# Altium PCB CustomESP32.PcbDoc
Units mil, origin at the board's own origin, x right, y up, seen from the top; angles counter-clockwise.
Board outline 2500 x 800 mil, 6 copper layers (L1 (Signal/Power), L2 (GND), L3 (Signal), L4 (Signal), L5 (GND), L6 (Signal/Power)), stack 55.468 mil thick; 49 components, 49 nets, 216 pads, 87 vias.
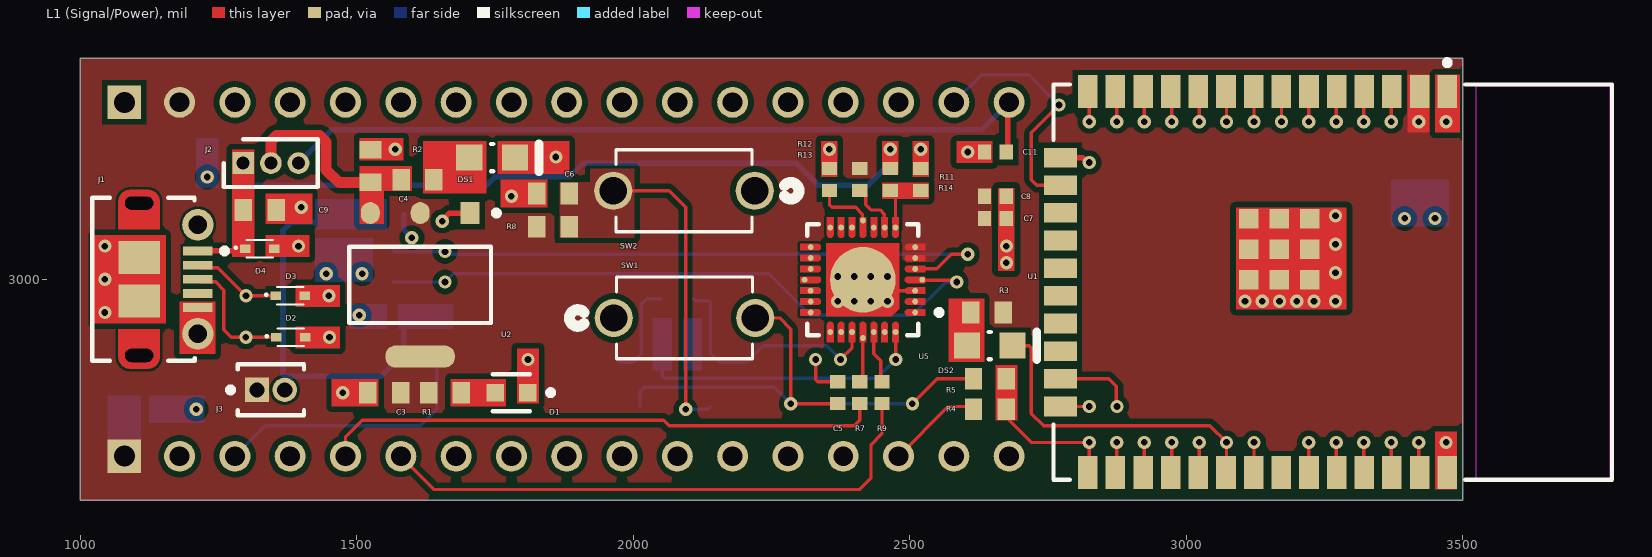
[diagram p0: L1 (Signal/Power) view]
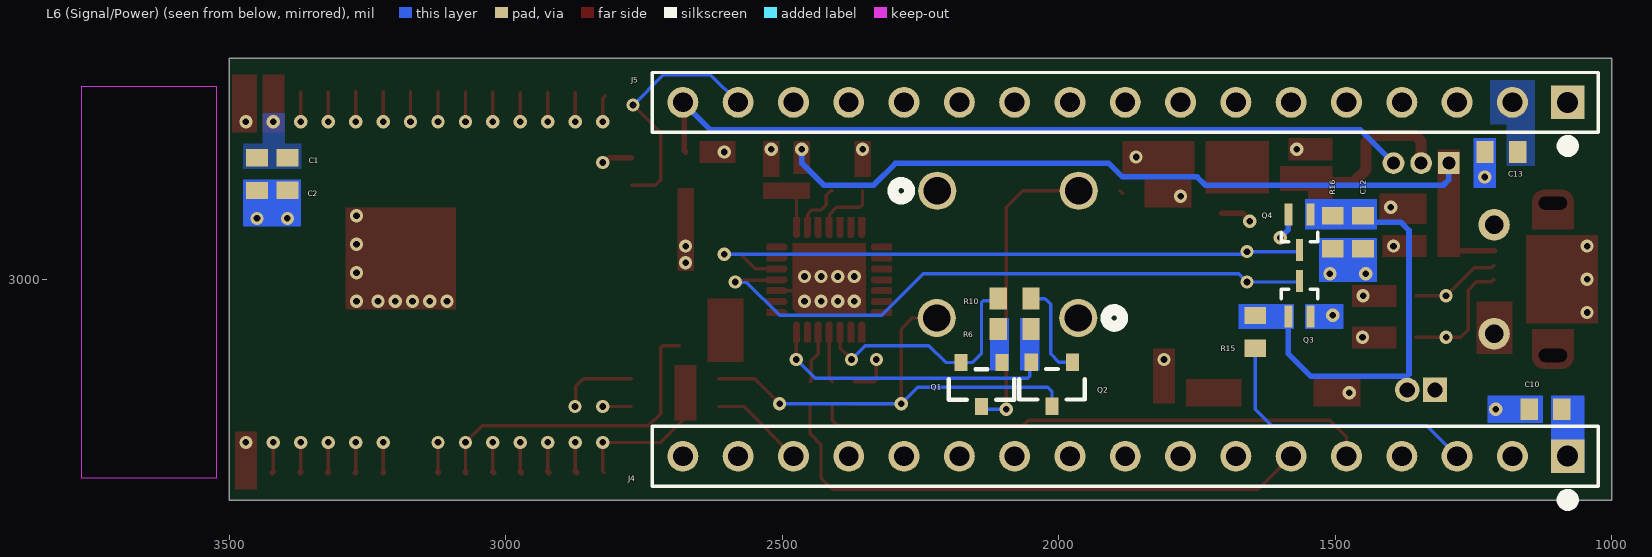
[diagram p1: L6 (Signal/Power) view, seen from below]
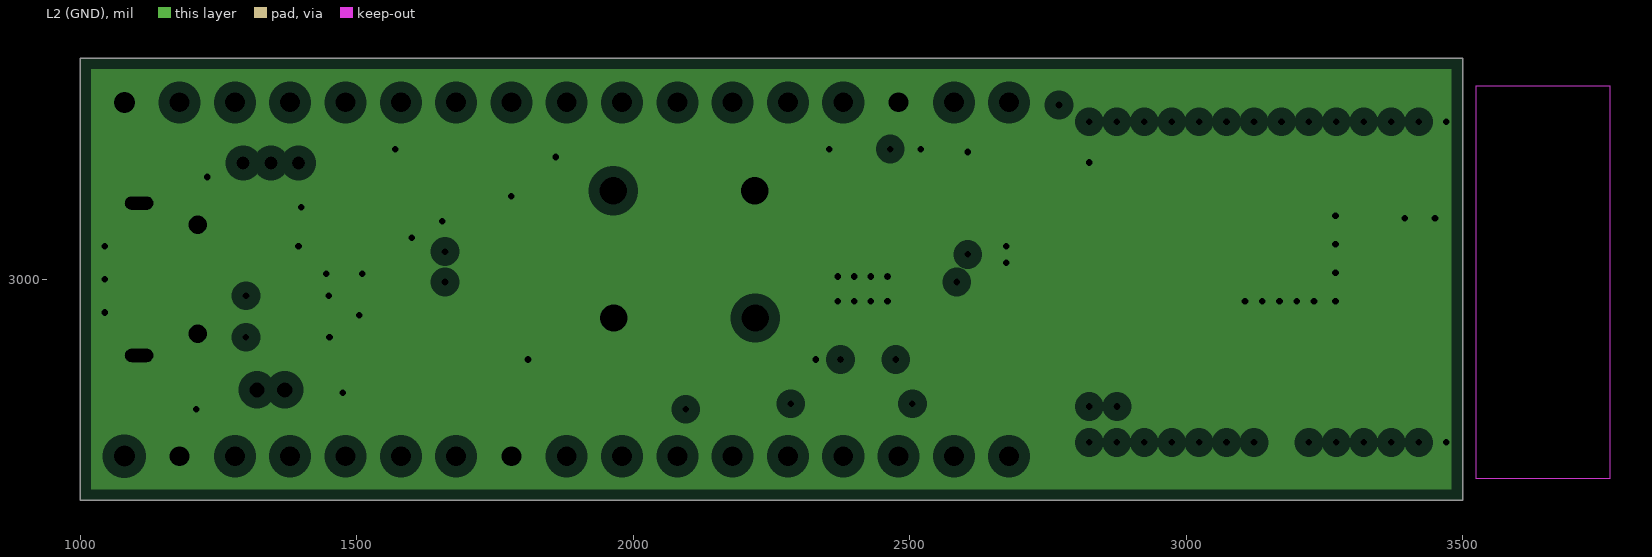
[diagram p2: L2 (GND), clearances drawn from the general rule]
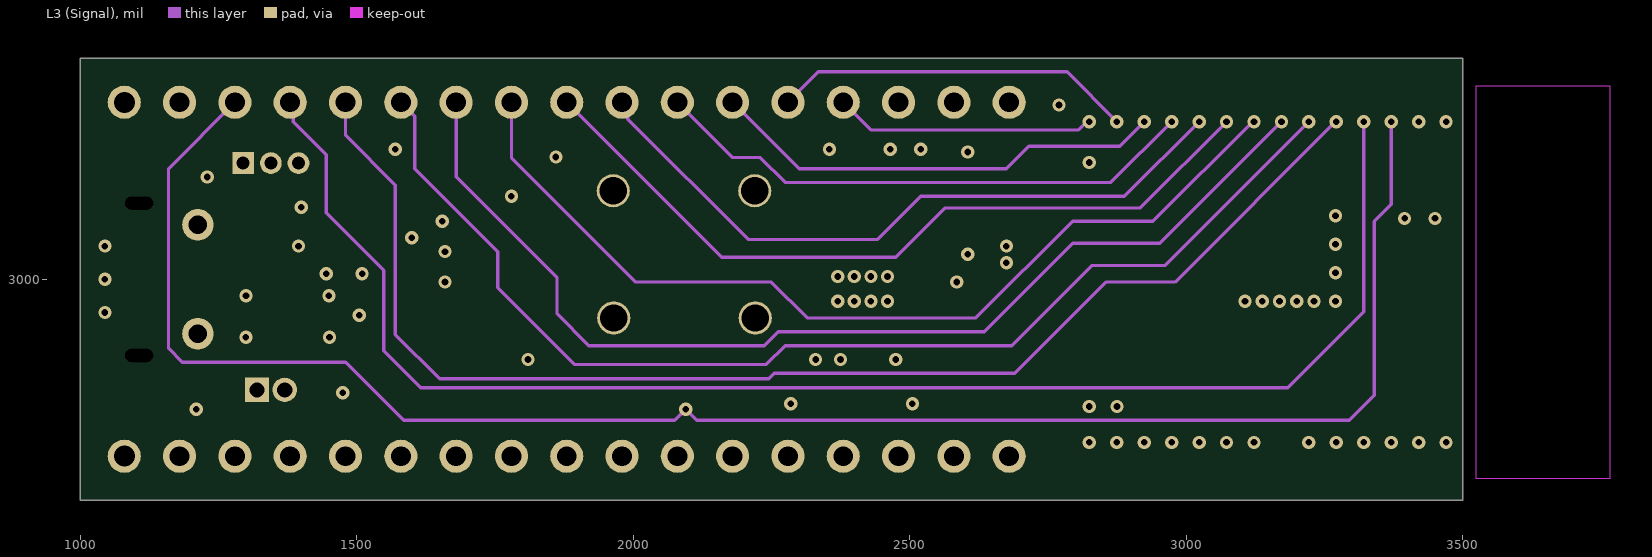
[diagram p3: L3 (Signal)]
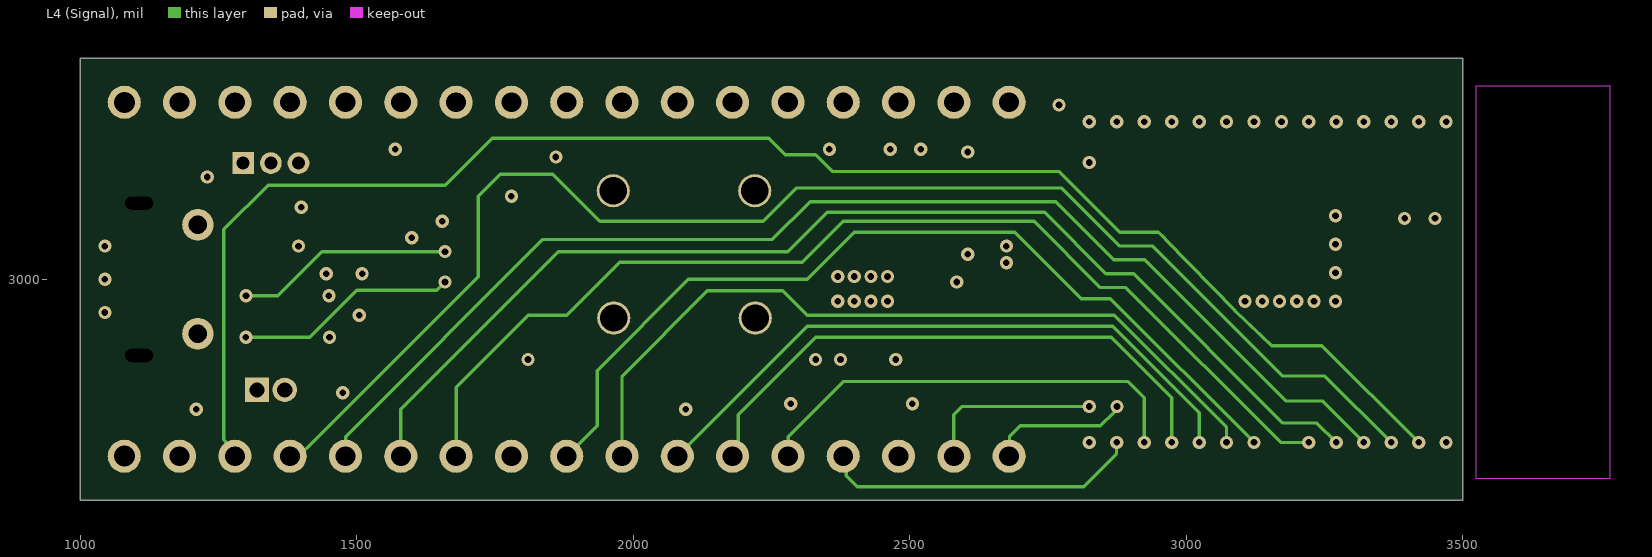
[diagram p4: L4 (Signal)]
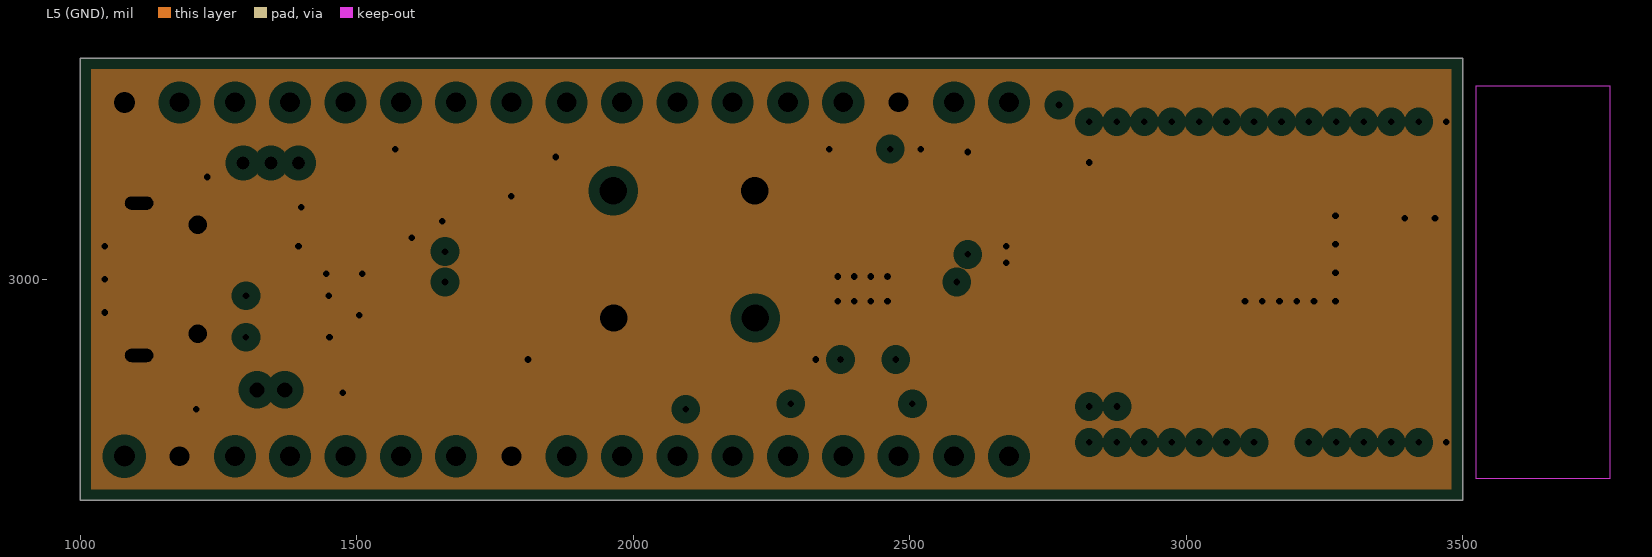
[diagram p5: L5 (GND), clearances drawn from the general rule]
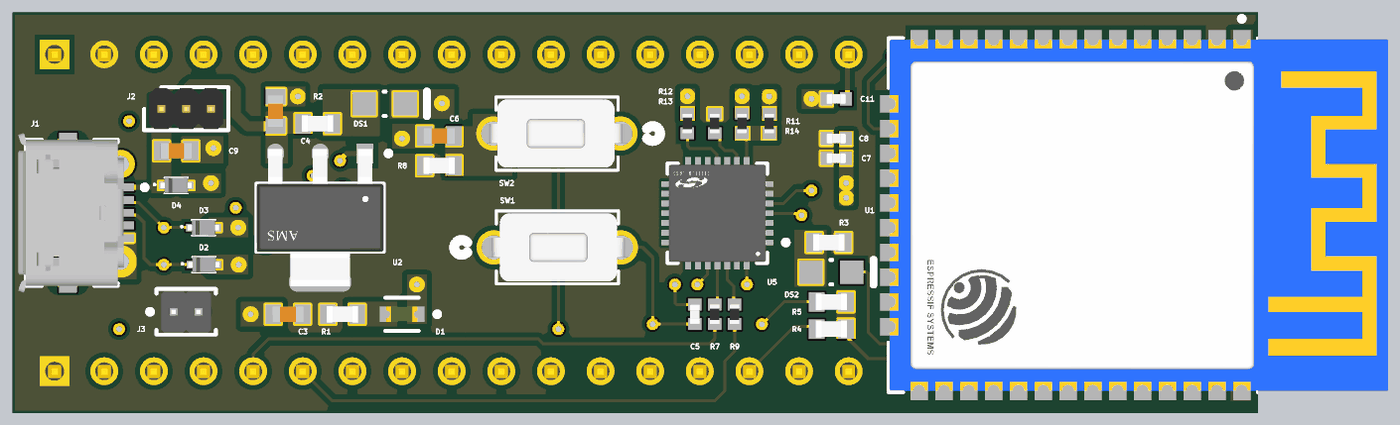
[diagram p6: 3D render of the assembled board from above, using the file's embedded part models]
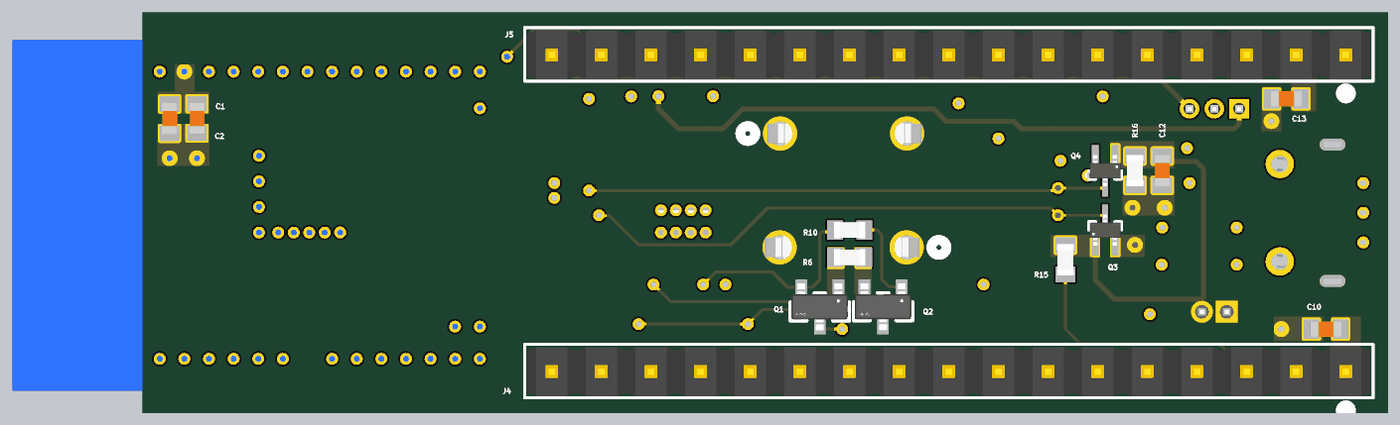
[diagram p7: 3D render of the assembled board from below, using the file's embedded part models]

## Layer stack, top to bottom
Top Solder: solder mask 1, SM-001, Dk 4
L1 (Signal/Power): signal copper 1.378
Dielectric 1: prepreg 2.8, PP-006, Dk 4.1
L2 (GND): plane copper 1.378, net GND
Dielectric 3: core 18, Core-035, Dk 4.7
L3 (Signal): signal copper 1.378
Dielectric 4: prepreg 2.8, PP-006, Dk 4.1
Dielectric 5: prepreg 2.8, PP-006, Dk 4.1
L4 (Signal): signal copper 1.378
Dielectric 6: core 18, Core-035, Dk 4.7
L5 (GND): plane copper 1.378, net GND
Dielectric 8: prepreg 2.8, PP-006, Dk 4.1
L6 (Signal/Power): signal copper 1.378
Bottom Solder: solder mask 1, SM-001, Dk 4

## Board outline
1000,2600 1000,3400 3500,3400 3500,2600

## Design rules (kind name [scope] priority, off if disabled: settings)
Clearance Clearance_J3 [HasFootprint('FP-GRPB021VWVN-RC-MFG')] p1: gap=5 ignorepadtopadclearanceinfootprint=FALSE
Clearance Clearance_J1 [HasFootprint('USB-MICRO-B_V')] p2: gap=5 ignorepadtopadclearanceinfootprint=FALSE
Clearance Clearance_U5 [HasFootprint('FP-CP2102N-A02-GQFN28-MFG')] p3: gap=5 ignorepadtopadclearanceinfootprint=FALSE
Clearance [All] p4: gap=10 ignorepadtopadclearanceinfootprint=FALSE except(0: Arc-Hole Track-Hole SMDPad-Hole THPad-Hole Via-Hole Fill-Hole Poly-Hole Region-Hole Text-Hole)
MinimumSolderMaskSliver MinimumSolderMaskSliver_1 [HasFootprint('USB-MICRO-B_V')] p1: minsoldermaskwidth=0
MinimumSolderMaskSliver [All] p2: minsoldermaskwidth=2
PlaneClearance [All] p1: clearance=20
PlaneConnect [All] p1: planeconnectstyle=Direct reliefexpansion=20 reliefentries=4 reliefconductorwidth=10 reliefairgap=10
PolygonConnect [All] p1: connectstyle=Direct reliefconductorwidth=10 reliefentries=4 polygonreliefangle="90 Angle" airgapwidth=10
RoutingVias [All] p1: holewidth=15 width=30 viastyle="Through Hole" minholewidth=15 minwidth=30 maxholewidth=28 maxwidth=50
SilkToSilkClearance [All] p1: silktosilkclearance=5
SilkToSolderMaskClearance [IsPad] p1: minsilkscreentomaskgap=3 clearancetoexposedcopper=TRUE
SolderMaskExpansion [All] p1: expansion=4 istentingtop=FALSE
Width [All] p1: maxlimit=20 minlimit=6 preferedwidth=10 midlayer1_maxwidth=10 midlayer2_maxwidth=10 minimp=50.000000 maximp=50.000000 favimp=50.000000
25 further rules are at their usual default settings.

## Components (designator, comment, footprint, x,y, rotation, side; value= is the part's Value field where it differs from the comment)
C1 "22uF/10V(20%)" CAP_0603 3395,3190.47 r90 bottom
C2 "0.1uF/50V(10%)" CAP_0603 3450,3190 r90 bottom
C3 "10uF/10V(20%)" CAP_0603 1550,2795 r0 top
C4 "10uF/10V(20%)" CAP_0603 1525,3205 r270 top
C5 "0.1uF/50V(10%)" CAP_0402 2370,2795 r270 top
C6 "0.1uF/50V(10%)" CAP_0603 1855,3155 r0 top
C7 "4.7uF/6.3V(10%)" CAP_0402 2655,3110 r180 top
C8 "0.1uF/50V(10%)" CAP_0402 2655,3150 r180 top
C9 "0.1uF/50V(10%)" CAP_0603 1325,3125 r180 top
C10 "0.1uF/50V(10%)" CAP_0603 1120,2765 r180 bottom
C11 "0.1uF/50V(10%)" CAP_0402 2655,3230 r0 top
C12 "0.1uF/50V(10%)" CAP_0603 1450,3085 r90 bottom
C13 "0.1uF/50V(10%)" CAP_0603 1200,3230 r180 bottom
D1 "LTST-C190GKT" FP-LTST-C190GKT-MFG 1780,2795 r180 top
D2 "LESD5D5.0CT1G" LESD5D50CT1G 1380.98,2895 r0 top
D3 "LESD5D5.0CT1G" LESD5D50CT1G 1380,2970 r0 top
D4 "LESD5D5.0CT1G" LESD5D50CT1G 1325,3055 r0 top
DS1 "LTST-C170KRKT" LTST-C170KRKT_V 1745,3220 r0 top
DS2 "LTST-C170KRKT" LTST-C170KRKT_V 2645,2880 r0 top
J1 "105017-0001" USB-MICRO-B_V 1160,3000 r270 top
J2 "M50-3530342" M50-3530342 1295,3210 r0 top
J3 "GRPB021VWVN-RC" FP-GRPB021VWVN-RC-MFG 1345,2800 r0 top
J4 "22284170" 22284170 1080,2680 r180 bottom
J5 "22284170" 22284170 1080,3320 r180 bottom
Q1 "SS8050-G" FP-SS8050-G-MFG 2140,2809.76 r270 bottom
Q2 "SS8050-G" FP-SS8050-G-MFG 2012.6,2810.24 r270 bottom
Q3 "2N7002T-7-F" 2N7002T-7-F 1565,2965 r90 bottom
Q4 "2N7002T-7-F" 2N7002T-7-F 1565,3085 r270 bottom
R1 "R0603" RES_0603 1660,2795 r180 top
R2 "R0603" RES_0603 1610,3180 r180 top
R3 "R0603" RES_0603 2640,2940 r0 top
R4 "R0603" RES_0603 2645,2765 r0 top
R5 "R0603" RES_0603 2645,2820 r0 top
R6 "10K(5%)" RES_0603 2080,2910 r0 bottom
R7 "0R(5%)" RES_0402 2410,2795 r90 top
R8 "10K(5%)" RES_0603 1855,3095 r0 top
R9 "0R(5%)" RES_0402 2450,2795 r90 top
R10 "10K(5%)" RES_0603 2080,2965 r180 bottom
R11 "22.1K(5%)" RES_0402 2465,3180.31 r90 top
R12 "10K(5%)(NC)" RES_0402 2355,3180.31 r90 top
R13 "1K(5%)" RES_0402 2410,3180.31 r270 top
R14 "47.5K(5%)" RES_0402 2520,3180.31 r270 top
R15 "1K(5%)" RES_0603 1645,2905 r270 bottom
R16 "10K(5%)(NC)" RES_0603 1505,3085 r90 bottom
SW1 "TL1107AF260WQ" TL1107AF260WQ 1965,2930 r0 top
SW2 "TL1107AF260WQ" TL1107AF260WQ 2220,3160 r180 top
U1 "ESP32-WROOM-32E (16MB)" FP-ESP32-WROOM-32E_16MB-MFG 3265,2995 r270 top
U2 "AMS1117-3.3" FP-AMS1117-IPC_C 1615,2990 r270 top
U5 "CP2102N-A02-GQFN28" FP-CP2102N-A02-GQFN28-MFG 2415.51,2999.06 r180 top

## Footprints (in the part's own frame and the unit in brackets; to place one, negate y for a bottom-side part, rotate by r counter-clockwise, add the part's x,y. Pads: shape width x height; smd on the part's side, far side on the other; paste and mask are expansions set on the pad)
2N7002T-7-F [mil]
  rect 40x14 smd: 1(-32,20) 2(-32,-20)
  rect 40x12 smd: 3(32,0)
  silkscreen extent 0,-33 17,33, body extent -31,-31 31,31, height 31
22284170 [mil]
  rect 60x60 / inner round 60 / far side rect 60x60 hole 38 paste-30 mask+0: 1(0,0)
  round 56 / inner round 60 / far side round 56 hole 36 paste-28 mask+0: 2(-100,0) 3(-200,0) 4(-300,0) 5(-400,0) 6(-500,0) 7(-600,0) 8(-700,0) 9(-800,0) 10(-900,0) 11(-1000,0) 12(-1100,0) 13(-1200,0) 14(-1300,0) 15(-1400,0) 16(-1500,0) 17(-1600,0)
  silkscreen extent -1655,-89 55,54, body extent -1650,-50 50,48, height 450
CAP_0402 [mm]
  rect 0.6x0.7 smd: 1(-0.5,0) 2(0.5,0)
  body extent -0.5,-0.26 0.5,0.26, height 0.37
CAP_0603 [mm]
  rect 0.8x1 smd: 1(-0.75,0) 2(0.75,0)
  body extent -0.8,-0.4 0.8,0.4, height 0.51
FP-AMS1117-IPC_C [mm]
  rect 1.004x0.872 smd paste+0 mask+0: 1(-3.295,2.29)
  rrect100% 1.004x0.872 smd paste+0 mask+0: 2(-3.295,0) 3(-3.295,-2.29)
  rrect87% 1.004x3.182 smd paste+0 mask+0: 4(3.295,0)
  silkscreen extent -3.42,-3.25 1.75,3.63, body extent -3.9,-3.35 3.9,3.35, height 0.25
FP-CP2102N-A02-GQFN28-MFG [mm]
  round 0.27 smd paste+0 mask+0: 1(-2.4,1.5) 2(-2.4,1) 3(-2.4,0.5) 4(-2.725,0) 5(-2.4,-0.5) 6(-2.4,-1) 7(-2.4,-1.5) 8(-1.5,-2.4) 9(-1,-2.4) 10(-0.5,-2.4) 11(0,-2.725) 12(0.5,-2.4) 13(1,-2.4) 14(1.5,-2.4) 15(2.4,-1.5) 16(2.4,-1) 17(2.4,-0.5) 18(2.675,0) 19(2.4,0.5) 20(2.4,1) 21(2.4,1.5) 22(1.5,2.4) 23(1,2.4) 24(0.5,2.4) 25(0,2.675) 26(-0.5,2.4) 27(-1,2.4) 28(-1.5,2.4)
  round 3.015 smd paste-1000 mask+0: 29(0,0)
  L1 (Signal/Power) region: -1.35,2.875 -1.35,2.075 -1.361,2.018 -1.394,1.969 -1.443,1.936 -1.5,1.925 -1.5,1.925 -1.557,1.936 -1.606,1.969 -1.639,2.018 -1.65,2.075 -1.65,2.075 -1.65,2.875
  L1 (Signal/Power) region: -0.85,2.875 -0.85,2.075 -0.861,2.018 -0.894,1.969 -0.943,1.936 -1,1.925 -1,1.925 -1.057,1.936 -1.106,1.969 -1.139,2.018 -1.15,2.075 -1.15,2.075 -1.15,2.875
  L1 (Signal/Power) region: -0.35,2.875 -0.35,2.075 -0.361,2.018 -0.394,1.969 -0.443,1.936 -0.5,1.925 -0.5,1.925 -0.557,1.936 -0.606,1.969 -0.639,2.018 -0.65,2.075 -0.65,2.075 -0.65,2.875
  L1 (Signal/Power) region: 0.15,2.875 0.15,2.075 0.139,2.018 0.106,1.969 0.057,1.936 0,1.925 0,1.925 -0.057,1.936 -0.106,1.969 -0.139,2.018 -0.15,2.075 -0.15,2.075 -0.15,2.875
  L1 (Signal/Power) region: 0.65,2.875 0.65,2.075 0.639,2.018 0.606,1.969 0.557,1.936 0.5,1.925 0.5,1.925 0.443,1.936 0.394,1.969 0.361,2.018 0.35,2.075 0.35,2.075 0.35,2.875
  L1 (Signal/Power) region: 1.15,2.875 1.15,2.075 1.139,2.018 1.106,1.969 1.057,1.936 1,1.925 1,1.925 0.943,1.936 0.894,1.969 0.861,2.018 0.85,2.075 0.85,2.075 0.85,2.875
  L1 (Signal/Power) region: 1.65,2.875 1.65,2.075 1.639,2.018 1.606,1.969 1.557,1.936 1.5,1.925 1.5,1.925 1.443,1.936 1.394,1.969 1.361,2.018 1.35,2.075 1.35,2.075 1.35,2.875
  L1 (Signal/Power) region: 1.35,-2.875 1.35,-2.075 1.361,-2.018 1.394,-1.969 1.443,-1.936 1.5,-1.925 1.5,-1.925 1.557,-1.936 1.606,-1.969 1.639,-2.018 1.65,-2.075 1.65,-2.075 1.65,-2.875
  L1 (Signal/Power) region: 0.85,-2.875 0.85,-2.075 0.861,-2.018 0.894,-1.969 0.943,-1.936 1,-1.925 1,-1.925 1.057,-1.936 1.106,-1.969 1.139,-2.018 1.15,-2.075 1.15,-2.075 1.15,-2.875
  L1 (Signal/Power) region: 0.35,-2.875 0.35,-2.075 0.361,-2.018 0.394,-1.969 0.443,-1.936 0.5,-1.925 0.5,-1.925 0.557,-1.936 0.606,-1.969 0.639,-2.018 0.65,-2.075 0.65,-2.075 0.65,-2.875
  L1 (Signal/Power) region: -0.15,-2.875 -0.15,-2.075 -0.139,-2.018 -0.106,-1.969 -0.057,-1.936 0,-1.925 0,-1.925 0.057,-1.936 0.106,-1.969 0.139,-2.018 0.15,-2.075 0.15,-2.075 0.15,-2.875
  L1 (Signal/Power) region: -0.65,-2.875 -0.65,-2.075 -0.639,-2.018 -0.606,-1.969 -0.557,-1.936 -0.5,-1.925 -0.5,-1.925 -0.443,-1.936 -0.394,-1.969 -0.361,-2.018 -0.35,-2.075 -0.35,-2.075 -0.35,-2.875
  L1 (Signal/Power) region: -1.15,-2.875 -1.15,-2.075 -1.139,-2.018 -1.106,-1.969 -1.057,-1.936 -1,-1.925 -1,-1.925 -0.943,-1.936 -0.894,-1.969 -0.861,-2.018 -0.85,-2.075 -0.85,-2.075 -0.85,-2.875
  L1 (Signal/Power) region: -1.65,-2.875 -1.65,-2.075 -1.639,-2.018 -1.606,-1.969 -1.557,-1.936 -1.5,-1.925 -1.5,-1.925 -1.443,-1.936 -1.394,-1.969 -1.361,-2.018 -1.35,-2.075 -1.35,-2.075 -1.35,-2.875
  L1 (Signal/Power) region: 2.875,1.35 2.075,1.35 2.018,1.361 1.969,1.394 1.936,1.443 1.925,1.5 1.925,1.5 1.936,1.557 1.969,1.606 2.018,1.639 2.075,1.65 2.075,1.65 2.875,1.65
  L1 (Signal/Power) region: 2.875,0.85 2.075,0.85 2.018,0.861 1.969,0.894 1.936,0.943 1.925,1 1.925,1 1.936,1.057 1.969,1.106 2.018,1.139 2.075,1.15 2.075,1.15 2.875,1.15
  L1 (Signal/Power) region: 2.875,0.35 2.075,0.35 2.018,0.361 1.969,0.394 1.936,0.443 1.925,0.5 1.925,0.5 1.936,0.557 1.969,0.606 2.018,0.639 2.075,0.65 2.075,0.65 2.875,0.65
  L1 (Signal/Power) region: 2.875,-0.15 2.075,-0.15 2.018,-0.139 1.969,-0.106 1.936,-0.057 1.925,0 1.925,0 1.936,0.057 1.969,0.106 2.018,0.139 2.075,0.15 2.075,0.15 2.875,0.15
  L1 (Signal/Power) region: 2.875,-0.65 2.075,-0.65 2.018,-0.639 1.969,-0.606 1.936,-0.557 1.925,-0.5 1.925,-0.5 1.936,-0.443 1.969,-0.394 2.018,-0.361 2.075,-0.35 2.075,-0.35 2.875,-0.35
  L1 (Signal/Power) region: 2.875,-1.15 2.075,-1.15 2.018,-1.139 1.969,-1.106 1.936,-1.057 1.925,-1 1.925,-1 1.936,-0.943 1.969,-0.894 2.018,-0.861 2.075,-0.85 2.075,-0.85 2.875,-0.85
  L1 (Signal/Power) region: 2.875,-1.65 2.075,-1.65 2.018,-1.639 1.969,-1.606 1.936,-1.557 1.925,-1.5 1.925,-1.5 1.936,-1.443 1.969,-1.394 2.018,-1.361 2.075,-1.35 2.075,-1.35 2.875,-1.35
  L1 (Signal/Power) region: -2.875,-1.35 -2.075,-1.35 -2.018,-1.361 -1.969,-1.394 -1.936,-1.443 -1.925,-1.5 -1.925,-1.5 -1.936,-1.557 -1.969,-1.606 -2.018,-1.639 -2.075,-1.65 -2.075,-1.65 -2.875,-1.65
  L1 (Signal/Power) region: -2.875,-0.85 -2.075,-0.85 -2.018,-0.861 -1.969,-0.894 -1.936,-0.943 -1.925,-1 -1.925,-1 -1.936,-1.057 -1.969,-1.106 -2.018,-1.139 -2.075,-1.15 -2.075,-1.15 -2.875,-1.15
  L1 (Signal/Power) region: -2.875,-0.35 -2.075,-0.35 -2.018,-0.361 -1.969,-0.394 -1.936,-0.443 -1.925,-0.5 -1.925,-0.5 -1.936,-0.557 -1.969,-0.606 -2.018,-0.639 -2.075,-0.65 -2.075,-0.65 -2.875,-0.65
  L1 (Signal/Power) region: -2.875,0.15 -2.075,0.15 -2.018,0.139 -1.969,0.106 -1.936,0.057 -1.925,0 -1.925,0 -1.936,-0.057 -1.969,-0.106 -2.018,-0.139 -2.075,-0.15 -2.075,-0.15 -2.875,-0.15
  L1 (Signal/Power) region: -2.875,0.65 -2.075,0.65 -2.018,0.639 -1.969,0.606 -1.936,0.557 -1.925,0.5 -1.925,0.5 -1.936,0.443 -1.969,0.394 -2.018,0.361 -2.075,0.35 -2.075,0.35 -2.875,0.35
  L1 (Signal/Power) region: -2.875,1.15 -2.075,1.15 -2.018,1.139 -1.969,1.106 -1.936,1.057 -1.925,1 -1.925,1 -1.936,0.943 -1.969,0.894 -2.018,0.861 -2.075,0.85 -2.075,0.85 -2.875,0.85
  L1 (Signal/Power) region: -2.875,1.65 -2.075,1.65 -2.018,1.639 -1.969,1.606 -1.936,1.557 -1.925,1.5 -1.925,1.5 -1.936,1.443 -1.969,1.394 -2.018,1.361 -2.075,1.35 -2.075,1.35 -2.875,1.35
  L1 (Signal/Power) region: -1.675,1.325 -1.325,1.675 1.675,1.675 1.675,-1.675 -1.675,-1.675 -1.675,1.325
  silkscreen extent -3.63,-2.55 2.55,2.55, body extent -2.98,-2.98 2.98,2.98, height 0.25
FP-ESP32-WROOM-32E_16MB-MFG [mm]
  rect 1.5x0.9 smd paste+0 mask+0: 1(-8.75,5.26) 2(-8.75,3.99) 3(-8.75,2.72) 4(-8.75,1.45) 5(-8.75,0.18) 6(-8.75,-1.09) 7(-8.75,-2.36) 8(-8.75,-3.63) 9(-8.75,-4.9) 10(-8.75,-6.17) 11(-8.75,-7.44) 12(-8.75,-8.71) 13(-8.75,-9.98) 14(-8.75,-11.25) 25(8.75,-11.25) 26(8.75,-9.98) 27(8.75,-8.71) 28(8.75,-7.44) 29(8.75,-6.17) 30(8.75,-4.9) 31(8.75,-3.63) 32(8.75,-2.36) 33(8.75,-1.09) 34(8.75,0.18) 35(8.75,1.45) 36(8.75,2.72) 37(8.75,3.99) 38(8.75,5.26)
  rect 0.9x1.5 smd paste+0 mask+0: 15(-5.715,-12.5) 16(-4.445,-12.5) 17(-3.175,-12.5) 18(-1.905,-12.5) 19(-0.635,-12.5) 20(0.635,-12.5) 21(1.905,-12.5) 22(3.175,-12.5) 23(4.445,-12.5) 24(5.715,-12.5)
  rect 0.9x0.9 smd paste+0 mask+0: 39(-2.9,-2.46) 39(-2.9,-1.06) 39(-2.9,-3.86) 39(-1.5,-1.06) 39(-1.5,-2.46) 39(-1.5,-3.86) 39(-0.1,-1.06) 39(-0.1,-2.46) 39(-0.1,-3.86)
  Keep-Out Layer region: -9,6.561 9,6.561 9,12.751 -9,12.751
  silkscreen extent -10.2,-12.83 9.08,12.83, body extent -9.6,-13.35 9.6,12.93, height 0.25
FP-GRPB021VWVN-RC-MFG [mm]
  rect 1.12x1.12 hole 0.7 paste-1000 mask+0: 1(-0.635,0)
  round 1.12 hole 0.7 paste-1000 mask+0: 2(0.635,0)
  silkscreen extent -1.97,-1.17 1.52,1.17, body extent -1.62,-1.27 1.62,1.27, height 0.25
FP-LTST-C190GKT-MFG [mm]
  rect 0.8x0.8 smd paste+0 mask+0: 1(-0.75,0) 2(0.75,0)
  silkscreen extent -1.92,-0.85 0.85,0.85, body extent -1.25,-0.55 1.25,0.55, height 0.25
FP-SS8050-G-MFG [mm]
  rect 0.8x0.6 smd paste+0 mask+0: 1(-1.01,0.95) 2(-1.01,-0.95) 3(1.01,0)
  silkscreen extent -0.7,-1.5 0.7,1.5, body extent -1.21,-1.45 1.21,1.45, height 1.15
LESD5D50CT1G [mm]
  rect 0.48x0.4 smd: 1(-0.66,0) 2(0.66,0)
  silkscreen extent -1.15,-0.4 0.6,0.4, body extent -0.8,-0.4 0.8,0.4, height 0.6
LTST-C170KRKT_V [mm] "SMD, 2-Leads, Body 2x1.25mm"
  rect 1.2x1.2 smd: 1(-1.05,0) 2(1.05,0)
  silkscreen extent -0.05,-0.64 2.16,0.64, body extent -1,-0.63 1,0.63, height 1.2
M50-3530342 [mm]
  rect 1x1 hole 0.6: 1(0,0)
  round 1 hole 0.6: 2(1.27,0) 3(2.54,0)
  silkscreen extent -0.88,-1.1 3.42,1.1, body extent -0.64,-1.05 3.17,1.05, height 4
RES_0402 [mm]
  rect 0.6x0.7 smd: 1(-0.5,0) 2(0.5,0)
  body extent -0.5,-0.25 0.5,0.25, height 0.3
RES_0603 [mm]
  rect 0.8x1 smd: 1(-0.75,0) 2(0.75,0)
  body extent -0.8,-0.43 0.8,0.43, height 0.52
TL1107AF260WQ [mil]
  round 69 / inner round 60 / far side round 69 hole 49 paste-34.5 mask+0: 1(0,0) 2(255.91,0)
  silkscreen extent -80,-74 251,74, body extent -25,-69 285,69, height 157
USB-MICRO-B_V [mm] "USB, MICRO B, Body 7.491x4.695 mm, Pitch 0.65 mm"
  rect 0.4x1.35 smd: 1(-1.3,1.35) 2(-0.65,1.35) 3(0,1.35) 4(0.65,1.35) 5(1.3,1.35)
  round 1.45 hole 0.85: 6(-2.5,1.35) 7(2.5,1.35)
  rrect50% 0x0 hole 0.6 slot 1.3 at 90 deg: 8(-3.5,-1.35) 11(3.5,-1.35)
  rect 1.5x1.9 smd: 9(-1,-1.35) 10(1,-1.35)
  L1 (Signal/Power) circle w0.5: c-3.6,-1.8 r0.25
  L1 (Signal/Power) circle w0.5: c-3.6,-0.9 r0.25
  L1 (Signal/Power) circle w0.5: c3.6,-1.8 r0.25
  L1 (Signal/Power) circle w0.5: c3.6,-0.9 r0.25
  L1 (Signal/Power) region: -3.6,-1.8 -3.6,-0.9 -4.1,-0.9 -4.1,-1.8
  L1 (Signal/Power) region: 3.6,-0.9 3.6,-1.8 4.1,-1.8 4.1,-0.9
  L1 (Signal/Power) region: 2.3,-0.4 2.3,-2.3 3.6,-2.3 3.6,-0.4
  L1 (Signal/Power) region: -2.3,-2.3 -2.3,-0.4 -3.6,-0.4 -3.6,-2.3
  silkscreen extent -3.75,-3.5 3.75,2.7, body extent -4.1,-3.9 4.1,1.5, height 2.67

## Part data
C1: library part CAP_0603_50V, "Capacitor SMD 0603 50V", Capacitance=22uF
C2 C6 C9 C10 C12 C13: library part CAP_0603_50V, "Capacitor SMD 0603 50V", Capacitance=0.1uF
C3 C4: library part CAP_0603_50V, "Capacitor SMD 0603 50V", Capacitance=10uF
C5: library part CAP_0402_50V, "Capacitor SMD 0402 50V"
C7: library part CAP_0402_6V3, "Capacitor SMD 0402 6V3", Capacitance=4.7uF
C8 C11: library part CAP_0402_50V, "Capacitor SMD 0402 50V", Capacitance=0.1uF
D1: library part CMP-22017-000005-2, "LED GREEN CLEAR CHIP SMD", Case Code (Imperial)=0603, Case Code (Metric)=1608, Color=Green, Forward Current=30mA, Forward Voltage=2.1V, Lens Color=Colorless, Max Operating Temperature=85°C, Min Operating Temperature=-55°C, Package Quantity=1, Power Dissipation=100mW, Reverse Voltage=5V, Test Current=10mA, Voltage=2V, Case/Package=0603, Depth=0.8mm, Dominant Wavelength=569nm, Height=0.8mm, Illumination Color=Green, Lead Free="Lead Free", Length=1.6mm, Lens Style=Clear, Lens Transparency=Clear, Luminous Intensity=6mcd, Mount="Surface Mount", Number of Elements=1, Number of LEDs=1, Number of Pins=2, Packaging="Tape and Reel", Power Rating=100mW, Radiation Hardening=No, Viewing Angle=130°, Wavelength=565nm, Width=0.8mm
D2 D3 D4: "TVS Diode (Bi-directional)", Manufacturer_Name=LRC, Height=0.7mm, Manufacturer_Part_Number=LESD5D5.0CT1G
DS1 DS2: library part CMP-2000-07593-1, "LED Red, 75 mW, 54 mcd, -55 to 85 degC, 2-Pin SMD, RoHS, Tape and Reel", Case Code (Imperial)=0805, Case Code (Metric)=2012, Colour=Red, Forward Current=30mA, Forward Voltage=2V, Lens Colour=Colorless, Manufacturer=Lite-On, Max Operating Temperature=85degC, Min Operating Temperature=-55degC, Package Description="2-Pin Surface Mount Device, Body 2 x 1.25 mm", Package Quantity=1, Package Reference=C170KRKT, Power Dissipation=75mW, Test Current=20mA, Case\/Package=0805, Datasheet URL=http://optoelectronics.liteon.com/upload/download/DS-22-99-0150/LTST-C170KRKT.pdf, Datasheet Version="Rev. D, 11/2014", Depth=1.6mm, Dominant Wavelength=631nm, Height=1.1mm, Illumination Colour=Red, Lead Free=LeadFree, Length=3.2mm, Lens Style=Rectangular, Lens Transparency=Clear, Luminous Intensity=54mcd, Manufacturer URL=http://www.us.liteon.com/, Mount=SurfaceMount, Mounting Technology=SurfaceMount, Number of Elements=1, Number of LEDs=1, Number of Pins=2, Packaging=TapeandReel, Power Rating=75mW, Radiation Hardening=No, RoHSCompliant=True, Viewing Angle=130degrees, Wavelength=639nm, Width=1.25mm
J1: library part CMP-2000-05827-1, "Micro-USB B Receptacle, Right Angle, Bottom Mount, Surface Mount, with Solder Tabs, -30 to 85 degC, 5-Pin USB, RoHS, Tape and Reel", Manufacturer=Molex, Package Description="5-Leads USB, Micro B, Body 7.5 x 5 mm, Pitch 0.65 mm", Package Reference=MICRO-B, Package Version="Rev. F, 12/2012", Standard Package=1, Voltage - Max=30V, 3D Model=105017-0001.stp, Catalog Drawings=1050170001, Category=Connectors,Interconnects, Circuits=5, Connector Type=USB-microB, Datasheet URL=http://www.molex.com/elqNow/elqRedir.htm?ref=http://www.molex.com/webdocs/datasheets/pdf/en-us/1050170001_IO_CONNECTORS.pdf, Datasheet Version=03/2016, Family=USB,DVI,HDMIConnectors, Featured Product=Micro-USBConnectorsUSBConnectors, Features=Shielded,SolderRetention, Gender=Receptacle, Ingress Protection=-, Manufacturer URL=http://www.molex.com/, Mating Products=WM17145-ND-CABLEMICROUSBBTOSTDA1.0MWM17147-ND-CABLEMICROUSBBTOSTDA2.0MWM17146-ND-CABLEMICROUSBBTOSTDA1.5M, Mounting Technology=SurfaceMount, Mounting Type=BoardCutout,SurfaceMount,RightAngle, Number of Contacts=5, Online Catalog=Molex-MicroUSB, Other Names=WM1399DKR, Package URL=http://www.molex.com/pdm_docs/sd/1050170001_sd.pdf, Packaging=Digi-Reel®, PCN Assembly/Origin=ResinSupplier21/Oct/2015, RoHS Information=1050170001CertofCompliance, Series=-, Specifications=-
J2: "Connector", Manufacturer_Name=Harwin, Mouser Part Number=855-M50-3530342, Datasheet Link=https://cdn.harwin.com/pdfs/M50-353.pdf, Height=4.3mm, Manufacturer_Part_Number=M50-3530342, Mouser Price/Stock=https://www.mouser.co.uk/ProductDetail/Harwin/M50-3530342?qs=%252BdQmOuGyFcFOxjGK%2F4HnAg%3D%3D
J3: library part CMP-2000-06371-2, "CONN HEADER VERT 2POS 1.27MM", Package Quantity=1, Connector Type="Male Pin", Contact Mating Length=0.118inch, Contact Plating=Gold, Contact Type="Male Pin", Lead Free="Lead Free", Mount="Through Hole", Number of Positions=2, Number of Rows=1, Packaging=Bulk, Pitch=0.05inch, RoHS Compliant=Yes, Termination=Solder
J4 J5: "No Description Available", Mfr_Name="Molex Connector Corporation", RefDes=RefDes, Type=Type
Q1 Q2: library part CMP-20235-000001-1, "NPN TRANSISTOR 1.5A 40V SOT-23 R", Case/Package=TO-236-3, Collector Emitter Breakdown Voltage=25V, Collector Emitter Voltage (VCEO)=400mV, Max Collector Current=1.5A, Max Power Dissipation=300mW, Transition Frequency=100MHz, Max Breakdown Voltage=25V, Mount="Surface Mount", Packaging="Tape and Reel", RoHS Compliant=Yes
Q3 Q4: "Small Signal Field-Effect Transistor, 0.115A I(D), 60V, 1-Element, N-Channel, Silicon, Metal-oxide Semiconductor FET", Drain Current-Max (Abs) (ID)=2A, Drain-source On Resistance-Max=70R, DS Breakdown Voltage-Min=20V, Manufacturer="ON Semiconductor / Fairchild", Manufacturer Part Number=FDN340P, Max Operating Temperature=150°C, Operating Mode="ENHANCEMENT MODE", Package Body Material=Plastic, Package Shape=Rectangular, Package Style="SMALL OUTLINEMeter", Peak Reflow Temperature (Cel)=260°C, Power Dissipation-Max (Abs)=500mW, Time @ Peak Reflow Temperature-Max (s)=40s, Additional Feature="HIGH RELIABILITY", Category=MOSFETs, ComponentLink1Description=https://datasheet.ciiva.com:443/pdfs/VipMasterIC/IC/ONSM/ONSM-S-A0003584711/ONSM-S-A0003584686-1.pdf?src-supplier=IHS+Markit, ComponentLink1URL=https://datasheet.ciiva.com:443/pdfs/VipMasterIC/IC/ONSM/ONSM-S-A0003584711/ONSM-S-A0003584686-1.pdf?src-supplier=IHS+Markit, ComponentLink2Description=https://datasheet.ciiva.com/7968/276210-7968140.pdf?src-supplier=Element14, ComponentLink2URL=https://datasheet.ciiva.com/7968/276210-7968140.pdf?src-supplier=Element14, ComponentLink3Description=https://datasheet.ciiva.com/28548/276210-28548189.pdf?src-supplier=Element14, ComponentLink3URL=https://datasheet.ciiva.com/28548/276210-28548189.pdf?src-supplier=Element14, ComponentLink4Description=https://datasheet.ciiva.com:443/pdfs/VipMasterIC/IC/DIOD/DIOD-S-A0009691157/DIOD-S-A0009831364-1.pdf?src-supplier=IHS+Markit, ComponentLink4URL=https://datasheet.ciiva.com:443/pdfs/VipMasterIC/IC/DIOD/DIOD-S-A0009691157/DIOD-S-A0009831364-1.pdf?src-supplier=IHS+Markit, ComponentLink5Description=https://datasheet.ciiva.com/34302/1538460-34302350.pdf?src-supplier=Jameco, ComponentLink5URL=https://datasheet.ciiva.com/34302/1538460-34302350.pdf?src-supplier=Jameco, ComponentLink6Description=https://datasheet.ciiva.com/3304/ds30301-3304394.pdf?src-supplier=Avnet, ComponentLink6URL=https://datasheet.ciiva.com/3304/ds30301-3304394.pdf?src-supplier=Avnet, ComponentLink7Description=https://datasheet.ciiva.com/17103/2n7002t-7-f-17103286.pdf?src-supplier=Allied+Electronics, ComponentLink7URL=https://datasheet.ciiva.com/17103/2n7002t-7-f-17103286.pdf?src-supplier=Allied+Electronics, ComponentLink8Description=https://datasheet.ciiva.com/1188/ds30301-1188477.pdf?src-supplier=Element14, ComponentLink8URL=https://datasheet.ciiva.com/1188/ds30301-1188477.pdf?src-supplier=Element14, ComponentLink9Description=https://datasheet.ciiva.com/22712/1915455-22712378.pdf?src-supplier=Element14, ComponentLink9URL=https://datasheet.ciiva.com/22712/1915455-22712378.pdf?src-supplier=Element14, ComponentLink10Description=https://datasheet.ciiva.com/3304/ds30301-3304395.pdf?src-supplier=Avnet, ComponentLink10URL=https://datasheet.ciiva.com/3304/ds30301-3304395.pdf?src-supplier=Avnet, ComponentLink11Description=https://datasheet.ciiva.com/16287/ds30301-16287372.pdf?src-supplier=Future+Electronics, ComponentLink11URL=https://datasheet.ciiva.com/16287/ds30301-16287372.pdf?src-supplier=Future+Electronics, ComponentLink12Description=https://datasheet.ciiva.com/15219/getdatasheetpartid-141065-15219671.pdf?src-supplier=Verical, ComponentLink12URL=https://datasheet.ciiva.com/15219/getdatasheetpartid-141065-15219671.pdf?src-supplier=Verical, ComponentLink13Description=https://datasheet.ciiva.com/934/ds30301-934600.pdf?src-supplier=Digi-Key, ComponentLink13URL=https://datasheet.ciiva.com/934/ds30301-934600.pdf?src-supplier=Digi-Key, ComponentLink14Description=https://datasheet.ciiva.com/934/ds30301-934601.pdf?src-supplier=Digi-Key, ComponentLink14URL=https://datasheet.ciiva.com/934/ds30301-934601.pdf?src-supplier=Digi-Key, ComponentLink15Description=https://datasheet.ciiva.com/934/ds30301-934599.pdf?src-supplier=Digi-Key, ComponentLink15URL=https://datasheet.ciiva.com/934/ds30301-934599.pdf?src-supplier=Digi-Key, Drain Current-Max (ID)=2A, Feedback Cap-Max (Crss)=5pF, FET Technology="METAL-OXIDE SEMICONDUCTOR", JESD-30 Code=R-PDSO-G3, JESD-609 Code=e3, Moisture Sensitivity Level=1, Number of Elements=1, Pins=3, Polarity/Channel Type=P-CHANNEL, Pricing 1="1=0.1191, 10=0.1173, 25=0.1155, 100=0.1137, 250=0.112, 500=0.1102, 1000=0.1084, 3000=0.1066, 6000=0.1048 (USD)", Pricing 2="3000=0.0523, 9000=0.0503, 15000=0.0494, 45000=0.0476, 75000=0.046 (USD)", Qualification Status="Not Qualified", Reach SVHC Compliant=Yes, RoHS=Yes, RoHS Compliant=Yes, Stock 1=946, Stock 2=396000, Supplier 1="Arrow Electronics", Supplier 2="Future Electronics", Supplier Part Number 1=FDN340P, Supplier Part Number 2=6857122, Surface Mount=Yes, Terminal Finish=Tin, Terminal Form="Gull Wing", Terminal Position=DUAL, Transistor Application=SWITCHING, Transistor Element Material=SILICON
R1 R2: library part RES_0603, "Resistor SMD 0603", Resistance=5.1k
R3: library part RES_0603, "Resistor SMD 0603", Resistance=560R
R4 R5: library part RES_0603, "Resistor SMD 0603", Resistance=22R
R6 R8 R10 R16: library part RES_0603, "Resistor SMD 0603", Resistance=10k
R7 R9 R11 R12 R13 R14: library part RES_0402, "Resistor SMD 0402"
R15: library part RES_0603, "Resistor SMD 0603", Resistance=1k
SW1 SW2: "No Description Available", Mfr_Name=E-Switch
U1: library part CMP-194065-000027-1, "RX TXRX MOD WIFI TRACE ANT SMD"
U2: library part CMP-209535-000001-1, "LDO Voltage Regulators 1A, 3.3V", Dropout Voltage=1.1V, Manufacturer="Advanced Monolithic Systems", Max Junction Temp=+125°C, Max Power Dissipation=1.2W, Max Supply Voltage=15V, Nominal Supply Current=5mA, Output Current=1A, Output Voltage=3.3V, Package=AMS1117, Temperature="-40°C to +125°C", Temperature Range Low=-40°C, Automotive=No, Category=IC, ComponentLink2Description=Datasheet, ComponentLink2URL=http://www.advanced-monolithic.com/pdf/ds1117.pdf, Device Class L1="Integrated Circuits (ICs)", Device Class L2="Power Management ICs", Device Class L3="Voltage Regulators - Linear", Height=1.8mm, Ipc Land Pattern Name=SOT229P700X180-4, Lead Free=Yes, Manufacturer Part Number=AMS1117-3.3, Number Of Outputs=1, Octopart=https://octopart.com/ams1117-3.3-advanced+monolithic+systems-25899300, Output Type=Fixed, RoHS=TRUE, Standoff Height=0.64mm, Temperature Range High=+125°C
U5: library part CMP-08093-000005-1, "IC USB TO UART BRIDGE QFN28"

## Via types
v1: diameter 24, hole 12, L1 (Signal/Power) to L6 (Signal/Power), 87 vias

## Nets (pads, with @x,y where several pads share a name; then routed paths per layer and width w, separated by ;. In a path a pad name is that pad's centre, name@x,y a point inside that pad or via, vN(x,y) a via of type N, cw(c..) or ccw(c..) an arc to the next point about the centre after c; other vN are vias at no path point)
3v3: C1.2 C2.2 C3.2 C7.2 C8.2 C10.2 C13.2 J3.1 J4.1 J5.2 R1.2 R3.2 R8.1 R13.1 U1.2 U2.2 U2.4 U5.6 U5.7
  other v1: 3420.38,3285
5V: C4.2 J2.2 R2.2 U2.3 | length 289
  L1 (Signal/Power) w10: C4.2@1524.53,3175 C4.2
  L1 (Signal/Power) w20: J2.2 1345,3250 1355,3260 1433.28,3260 1445,3248.28 1445,3197.94 1467.94,3175 C4.2@1524.53,3175
GND: C1.1 C2.1 C3.1 C4.1 C5.1 C6.1 C7.1 C8.1 C9.1 C10.1 C11.1 C12.1 C13.1 D1.1 D2.2 D3.2 D4.2 DS1.2 J1.5 J1.6 J1.7 J1.8 J1.9 J1.10 J1.11 J4.2 J4.8 J5.1 J5.15 Q3.2 Q4.2 R12.2 R14.1 R16.1 SW1.1 SW2.1 U1.1 U1.15 U1.38 U1.39 U2.1 U5.3 U5.29 | length 297.7
  L1 (Signal/Power) w6: v1(2330,2855) 2330,2818.2 2333.51,2814.68 C5.1 ; v1(2460,2960) 2479.37,2979.37 U5.3
  L1 (Signal/Power) w10: v1(1655,3105) 1655,3106.87 1667.86,3119.72 U2.1 ; U1.15 2812.68,3220 2821.68,3211 v1(2825,3211)
  L6 (Signal/Power) w10: Q4.2 1585.61,3116.39 1585.61,3089.39 v1(1600,3075)
  other v1: 3470,2705 1210,2765 1475,2795 1810,2855 1450.98,2895 1505,2935 1045,2940 2370,2960 2400,2960 2430,2960 3106.38,2960.18 3137.59,2960 3168.79,2960 3200,2960 3231.21,2960 3270,2960 1450,2970 1045,3000 2370,3005 2400,3005 2430,3005 2460,3005 1445,3010 1510,3010 3270,3011.67 2675,3030 1045,3060 1395,3060 2675,3060 3270,3063.33 3395,3110 3450,3110 3270,3115 1400,3130.43 1780,3150 1230,3185 1860.4,3221 2605,3230 1570,3235 2355,3235.31 2520,3235 3470,3285
NetC5_2: C5.2 Q2.3 R5.1 SW1.2 | length 956.6
  L1 (Signal/Power) w6: SW1.2 2265,2930 2285,2910 v1(2285,2775) 2369.69,2775 C5.2 ; v1(2505,2775) 2550,2820 R5.1
  L6 (Signal/Power) w6: Q2.3 2012.6,2797.6 2020,2805 2049.17,2805 2049.39,2804.78 2255.22,2804.78 v1(2285,2775) v1(2505,2775)
NetC6_2: C6.2 J5.3 Q1.3 R8.2 SW2.2 U1.3 | length 3887.2
  L1 (Signal/Power) w6: C6.2 C6.2@1889.53,3160 ; SW2.2 2065,3160 2095,3130 v1(2095,2765) ; v1(3370.77,3285) U1.3@3370.77,3338.17
  L3 (Signal) w6: J5.3 1160,3200 1160,2875 1185,2850 1480,2850 1585,2745 2075,2745 v1(2095,2765) 2115,2745 3295,2745 3340,2790 3340,3104.6 3370.77,3135.37 v1(3370.77,3285)
  L6 (Signal/Power) w6: v1(2095,2765) 2135,2765 Q1.3
NetC9_2: C9.2 D4.1 J1.1 J2.1 R11.2 | length 1368.3
  L1 (Signal/Power) w10: J1.1 1288.62,3051.18 1297.44,3060 D4.1@1299.02,3060
  L6 (Signal/Power) w10: J2.1 1295,3180 1305,3170 1735,3170 1750,3185 1885,3185 1909.5,3209.5 2295.5,3209.5 2335,3170 2425,3170 2465,3210 v1(2465,3235.31)
NetC11_2: C11.2 J2.3 J5.17 | length 1433.4
  L1 (Signal/Power) w10: C11.2 2677.34,3232.66 2677.34,3317.34 J5.17
  L6 (Signal/Power) w10: J2.3@1402.95,3210 J2.3 1455,3270 2630,3270 J5.17
  L6 (Signal/Power) w20: J2.3@1402.95,3207.29 J2.3@1402.95,3210
NetC12_2: C12.2 J3.2 Q3.1 Q4.1 R15.1 R16.2 | length 699.3
  L6 (Signal/Power) w6: 1367,2828 1370,2825
  L6 (Signal/Power) w10: 1367,2828 1367,3088.49 1381.95,3103.43 1438.9,3103.43 1452.97,3117.5 R16.2@1490,3117.5 ; 1370,2825 1545,2825 1585,2865 Q3.1
NetD1_2: D1.2 R1.1
NetD2_1: D2.1 J1.3 Q3.3 U5.4 | length 1775.8
  L1 (Signal/Power) w6: J1.3 1217.87,2995.28 1245.11,2995.28 1260,2980.39 1260,2908.51 1273.51,2895 1299.81,2895 v1(1299.9,2895.1) ; v1@1299.9,2895 D2.1 ; U5.4 2523.57,2998.28 2581.72,2998.28 v1(2585,2995)
  L4 (Signal) w6: v1(1299.9,2895.1) 1415.73,2895.1 1500.63,2980 1645,2980 v1(1660,2995)
  L6 (Signal/Power) w6: Q3.3 1567,2995 v1(1660,2995) 1675,3010 2245,3010 2320,2935 2505,2935 2564,2994 2584,2994 v1(2585,2995)
NetD3_1: D3.1 J1.2 Q4.3 U5.5 | length 1704.1
  L1 (Signal/Power) w6: J1.2 1217.87,3020.87 1249.13,3020.87 v1(1300,2970) D3.1 ; U5.5 2548.74,3018.74 2575,3045 v1(2605,3045)
  L4 (Signal) w6: v1(1300,2970) 1357.44,2970 1437.44,3050 v1(1660,3050)
  L6 (Signal/Power) w6: Q4.3 1568,3050 v1(1660,3050) ; v1@1660,3045 v1(2605,3045)
NetDS1_1: DS1.1 R2.1
NetDS2_1: DS2.1 R3.1
NetDS2_2: DS2.2 J4.10 U1.30 | length 2015.1
  L1 (Signal/Power) w6: DS2.2 2716.49,2880 2720,2876.49 2720,2757.25 2742.25,2735 3043.08,2735 v1(3073.08,2705) U1.30@3073.08,2651.5
  L1 (Signal/Power) w10: U1.30 U1.30@3073.08,2651.5
  L4 (Signal) w6: J4.10 1980,2825 2134,2979 2271,2979 2315,2935 2870.06,2935 3073.08,2731.99 v1(3073.08,2705)
NetJ4_3: J4.3 R15.2 U1.37 | length 3440.8
  L1 (Signal/Power) w6: U1.37@3420.38,2652.21 v1(3420.38,2705)
  L1 (Signal/Power) w10: U1.37@3420.38,2652.21 U1.37
  L4 (Signal) w6: J4.3 1280,2690.18 1260,2710.18 1260,3090 1340,3170 1660,3170 1745,3255 2245,3255 2275,3225 2329.96,3225 2359.96,3195 2770,3195 2880,3085 2950,3085 2959.97,3075.03 2963.49,3071.51 3088.44,2942.77 ccw(c3106.38,2960.18) 3089.24,2941.98 3155,2880 3157.49,2880 3245.38,2880 v1(3420.38,2705)
  L6 (Signal/Power) w6: J4.3 1335,2735 1615,2735 1645,2765 R15.2
NetJ4_4: J4.4 U1.36 | length 2592.8
  L1 (Signal/Power) w6: U1.36@3370.77,2651.83 v1(3370.77,2705)
  L1 (Signal/Power) w10: U1.36@3370.77,2651.83 U1.36
  L4 (Signal) w6: J4.4 1394.61,2680 1408.51,2693.9 1409.25,2693.9 1720,3004.64 1720,3150 1760,3190 1855,3190 1940,3105 2235,3105 2295,3165 2775,3165 2880,3060 2940,3060 3175,2825 3250.77,2825 v1(3370.77,2705)
NetJ4_5: J4.5 R7.1 U1.35 | length 3303.3
  L1 (Signal/Power) w6: J4.5 1480,2715 1510,2745 2055,2745 2065,2735 2400,2735 2410,2745 R7.1 ; U1.35@3321.15,2651.45 v1(3321.15,2705)
  L1 (Signal/Power) w10: U1.35@3321.15,2651.45 U1.35
  L4 (Signal) w6: J4.5 1480.49,2680.49 1480.49,2715.49 1837,3072 2252,3072 2320,3140 2764,3140 2869,3035 2925,3035 3180,2780 3246.15,2780 v1(3321.15,2705)
NetJ4_6: J4.6 R9.1 U1.34 | length 3177.8
  L1 (Signal/Power) w6: J4.6 1640,2620 2410,2620 2430,2640 2430,2700.26 2450,2720.26 R9.1 ; U1.34@3271.54,2651.06 v1(3271.54,2705)
  L1 (Signal/Power) w10: U1.34@3271.54,2651.06 U1.34
  L4 (Signal) w6: J4.6 1580,2765 1865,3050 2280,3050 2351,3121 2744,3121 2855,3010 2905,3010 3175,2740 3236.54,2740 v1(3271.54,2705)
NetJ4_7: J4.7 U1.33 | length 2011.4
  L1 (Signal/Power) w6: U1.33@3221.92,2650.68 v1(3221.92,2705)
  L1 (Signal/Power) w10: U1.33@3221.92,2650.68 U1.33
  L4 (Signal) w6: J4.7 1680,2805 1810,2935 1880,2935 1976,3031 2306,3031 2380,3105 2725,3105 2845,2985 2891.03,2985 3171.03,2705 v1(3221.92,2705)
NetJ4_9: J4.9 U1.31 | length 1681.2
  L1 (Signal/Power) w6: U1.31@3122.69,2651.12 v1(3122.69,2705)
  L1 (Signal/Power) w10: U1.31 U1.31@3122.69,2651.12
  L4 (Signal) w6: J4.9 1935,2735 1935,2835 2100,3000 2315,3000 2400,3085 2690,3085 2810,2965 2862.69,2965 v1(3122.69,2705)
NetJ4_11: J4.11 U1.29 | length 1214.5
  L1 (Signal/Power) w6: U1.29@3023.46,2651.89 v1(3023.46,2705)
  L1 (Signal/Power) w10: U1.29 U1.29@3023.46,2651.89
  L4 (Signal) w6: J4.11 2315,2915 2867.44,2915 3023.46,2758.98 v1(3023.46,2705)
NetJ4_12: J4.12 U1.28 | length 1102.3
  L1 (Signal/Power) w6: U1.28@2973.85,2652.27 v1(2973.85,2705)
  L1 (Signal/Power) w10: U1.28 U1.28@2973.85,2652.27
  L4 (Signal) w6: J4.12 2190,2690 2190,2755 2330,2895 2864.81,2895 2973.85,2785.96 v1(2973.85,2705)
NetJ4_13: J4.13 U1.27 | length 868.9
  L1 (Signal/Power) w6: U1.27@2924.23,2652.66 v1(2924.23,2705)
  L1 (Signal/Power) w10: U1.27 U1.27@2924.23,2652.66
  L4 (Signal) w6: J4.13 2280.49,2680.49 2280.49,2715.49 2380,2815 2895,2815 2924.23,2785.77 v1(2924.23,2705)
NetJ4_14: J4.14 U1.26 | length 635.6
  L1 (Signal/Power) w6: U1.26@2874.62,2653.04 v1(2874.62,2705)
  L1 (Signal/Power) w10: U1.26 U1.26@2874.62,2653.04
  L4 (Signal) w6: J4.14 2385.49,2674.51 2385.49,2644.51 2405,2625 2815,2625 2874,2684 2874,2704.38 v1(2874.62,2705)
NetJ4_15: J4.15 R4.1 | length 172.8
  L1 (Signal/Power) w6: J4.15 2570,2770 R4.1@2615.47,2770
NetJ4_16: J4.16 U1.24 | length 378.3
  L1 (Signal/Power) w6: U1.24 v1(2825,2770)
  L4 (Signal) w6: J4.16 2580,2755 2595,2770 v1(2825,2770)
NetJ4_17: J4.17 U1.23 | length 399
  L1 (Signal/Power) w6: U1.23 2860,2820 2873.65,2806.35 2873.65,2771.35 v1(2875,2770)
  L4 (Signal) w6: J4.17 2680.49,2680.49 2680.49,2715.49 2700,2735 2845,2735 2868.65,2758.65 2868.65,2758.78 2875,2765.13 v1(2875,2770)
NetJ5_4: J5.4 U1.4 | length 2773.1
  L1 (Signal/Power) w6: v1(3321.15,3285) U1.4@3321.15,3338.55
  L3 (Signal) w6: J5.4 1385.49,3314.51 1385.49,3284.51 1445,3225 1445,3120 1549,3016 1549,2871 1616,2804 3184,2804 3321.15,2941.15 v1(3321.15,3285)
NetJ5_5: J5.5 U1.5 | length 2438.5
  L1 (Signal/Power) w6: v1(3271.54,3285) U1.5@3271.54,3338.94
  L3 (Signal) w6: J5.5 1480,3260 1570,3170 1570,2900 1650,2820 2245,2820 2255,2830 2690,2830 2855,2995 2979.87,2995 3269.87,3285 v1(3271.54,3285)
NetJ5_6: J5.6 U1.6 | length 2168.1
  L1 (Signal/Power) w6: v1(3221.92,3285) U1.6@3221.92,3339.32
  L3 (Signal) w6: J5.6 1580,3319.82 1605,3294.82 1605,3200 1755,3050 1755,2985 1894,2846 2241,2846 2275,2880 2685,2880 2830,3025 2961.92,3025 v1(3221.92,3285)
NetJ5_7: J5.7 U1.7 | length 2013.7
  L1 (Signal/Power) w6: v1(3172.31,3285) U1.7@3172.31,3339.27
  L3 (Signal) w6: J5.7 1680,3185 1862.5,3002.5 1862.5,2937.5 1920,2880 2237.37,2880 2262.37,2905 2635,2905 2795,3065 2952.31,3065 v1(3172.31,3285)
NetJ5_8: J5.8 U1.8 | length 1763.7
  L1 (Signal/Power) w6: v1(3122.69,3285) U1.8@3122.69,3338.88
  L3 (Signal) w6: J5.8 1780,3220 2005,2995 2250,2995 2315,2930 2620,2930 2795,3105 2940,3105 3120,3285 v1(3122.69,3285)
NetJ5_9: J5.9 U1.9 | length 1464
  L1 (Signal/Power) w6: v1(3073.08,3285) U1.9@3073.08,3338.5
  L3 (Signal) w6: J5.9 2160,3040 2475,3040 2564,3129 2917.08,3129 v1(3073.08,3285)
NetJ5_10: J5.10 U1.10 | length 1299.2
  L1 (Signal/Power) w6: v1(3023.46,3285) U1.10@3023.46,3338.11
  L3 (Signal) w6: J5.10 1990.33,3309.67 1990.33,3289.67 2208,3072 2442,3072 2520,3150 2888.46,3150 v1(3023.46,3285)
NetJ5_11: J5.11 U1.11 | length 1052.2
  L1 (Signal/Power) w6: v1(2973.85,3285) U1.11@2973.85,3337.73
  L3 (Signal) w6: J5.11 2180,3220 2230,3220 2275,3175 2863.85,3175 v1(2973.85,3285)
NetJ5_12: J5.12 U1.12 | length 881.5
  L1 (Signal/Power) w6: v1(2924.23,3285) U1.12@2924.23,3337.34
  L3 (Signal) w6: J5.12 2300,3200 2675,3200 2715.78,3240.78 2880.01,3240.78 v1(2924.23,3285)
NetJ5_13: J5.13 U1.13 | length 706.6
  L1 (Signal/Power) w6: v1(2874.62,3285) U1.13@2874.62,3336.96
  L3 (Signal) w6: J5.13 2335,3375 2784.62,3375 v1(2874.62,3285)
NetJ5_14: J5.14 U1.14 | length 520.6
  L1 (Signal/Power) w6: U1.14@2820,3331.57 2825,3326.57 v1(2825,3285)
  L3 (Signal) w6: J5.14 2430,3270 2805.49,3270 2820.49,3285 v1(2825,3285)
NetJ5_16: J5.16 U1.16 | length 446.2
  L1 (Signal/Power) w6: v1(2770,3315) 2720,3265 2720,3180 2730,3170 U1.16
  L6 (Signal/Power) w6: J5.16 2630,3370 2715,3370 v1(2770,3315)
NetQ1_1: Q1.1 R6.2
NetQ1_2: Q1.2 R10.1 U5.24 | length 448.7
  L1 (Signal/Power) w6: v1(2375,2855) 2395.83,2875.83 U5.24
  L6 (Signal/Power) w6: R10.1 2113.46,2961.06 2136.49,2961.06 2140,2957.55 2140,2865 2155.47,2849.53 Q1.2 2204.53,2849.53 2235,2880 2350,2880 v1(2375,2855)
NetQ2_1: Q2.1 R10.2 | length 175.6
  L6 (Signal/Power) w6: Q2.1 2000,2850 2015,2865 2015,2955 2025,2965 R10.2
NetQ2_2: Q2.2 R6.1 U5.28 | length 551.1
  L1 (Signal/Power) w6: U5.28 2474.78,2904.35 2474.78,2855.22 v1(2475,2855)
  L6 (Signal/Power) w6: Q2.2 Q2.2@2055,2850 ; 2052.5,2882.5 2052.5,2824.29 2056.01,2820.78 2440.78,2820.78 v1(2475,2855)
NetR4_2: R4.2 R5.2 U1.25 | length 244.5
  L1 (Signal/Power) w6: R4.2@2674.53,2770 2680.17,2764.36 2680.17,2744.83 2720,2705 v1(2825,2705) 2825,2653.43 U1.25
NetR7_2: R7.2 U5.25 | length 81.3
  L1 (Signal/Power) w6: R7.2 2415.51,2820.2 U5.25
NetR9_2: R9.2 U5.26 | length 96
  L1 (Signal/Power) w6: U5.26 2435.2,2865.36 2448.03,2852.53 2448.03,2816.65 R9.2
NetR11_1: R11.1 R14.2 U5.8 | length 71
  L1 (Signal/Power) w6: R11.1 2474.57,3151.06 U5.8
NetR12_1: R12.1 U5.11 | length 104.2
  L1 (Signal/Power) w6: R12.1 2355,3135 2360,3130 2402.36,3130 2414.73,3117.63 2414.73,3107.12 U5.11
NetR13_2: R13.2 U5.9 | length 93.2
  L1 (Signal/Power) w6: R13.2 2411.97,3160.63 2420.78,3151.82 2420.78,3134.46 2430,3125.24 2446.49,3125.24 2454.1,3117.63 U5.9@2454.1,3096.5
pads on no net: J1.4 U1.17 U1.18 U1.19 U1.20 U1.21 U1.22 U1.32 U5.1 U5.2 U5.10 U5.12 U5.13 U5.14 U5.15 U5.16 U5.17 U5.18 U5.19 U5.20 U5.21 U5.22 U5.23 U5.27

## Polygon pours and split planes (outlines as drawn)
3v3 on L6 (Signal/Power) "3V3_L06_P000" (solid, pour order 0): 1140,3360 1220,3360 1220,3280 1190,3280 1190,3205 1140,3205
3v3 on L6 (Signal/Power) "3V3_L06_P004" (solid, pour order 4): 3400,3300 3400,3245 3370,3245 3370,3200 3475,3200 3475,3245 3440,3245 3440,3300
3v3 on L1 (Signal/Power) "3V3_L01_P003" (solid, remove dead copper, pour order 3): 3500,2600 3500,3400 1000,3400 1000,2600
NetC6_2 on L1 (Signal/Power) "NETC6_2_L01_P001" (solid, pour order 1): 1867.5,3175 1922.5,3175 1922.5,3200 2002.5,3200 2002.5,3075 1867.5,3075
GND on L5 (GND) (split plane): 3479.9,2620.1 1020.1,2620.1 1020.1,3379.9 3479.9,3379.9
GND on L2 (GND) (split plane): 3479.9,2620.1 1020.1,2620.1 1020.1,3379.9 3479.9,3379.9

## Other copper
L1 (Signal/Power):
  rectangle net GND: 3090,2945 3290,3130
  rectangle net NetDS2_1: 2570,2850 2635,2965
  rectangle net NetR11_1: 2450,3145.31 2535,3175.31
  rectangle net NetC9_2: 2450,3190.31 2480,3250.31
  rectangle net GND: 2505,3185.31 2535,3250
  rectangle net GND: 2660,3015 2690,3165
  rectangle net GND: 2585,3210 2650,3250
  rectangle net GND: 2340,3185.31 2370,3250.31
  rectangle net 5V: 1505,3100 1550,3205
  rectangle net 5V: 1505,3160 1600,3205
  rectangle net GND: 1505,3215 1585,3255
  rectangle net GND: 1390,2950 1470,2990
  rectangle net NetR4_2: 2655,2745 2695,2845
  rectangle net GND: 3450,3265 3495,3370
  rectangle net GND: 1025,2920 1155,3080
  rectangle net GND: 1790,2775 1830,2875
  rectangle net NetD1_2: 1670,2770 1770,2820
  rectangle net GND: 1455,2770 1540,2820
  rectangle net GND: 1760,3130 1845,3180
  rectangle net GND: 1755,3190 1885,3250
  rectangle net NetDS1_1: 1620,3155 1735,3250
  rectangle net GND: 1335,3100 1420,3155
  rectangle net NetC9_2: 1275,3040 1315,3235
  rectangle net GND: 1180,2865 1245,2960
  rectangle net GND: 1390,2875 1470,2915
  rectangle net GND: 1335,3040 1415,3080
  rectangle net 3v3: 3400,3265 3440,3370
  rectangle net GND: 3450,2620 3490,2725
L6 (Signal/Power):
  rectangle net 3v3: 1050,2650 1110,2790
  rectangle net NetQ1_1: 2090,2835 2125,2930
  rectangle net NetQ2_2: 2035,2835 2070,2930
  rectangle net GND: 1485,2910 1555,2955
  rectangle net NetC12_2: 1575,2910 1675,2955
  rectangle net NetC12_2: 1425,3090 1555,3145
  rectangle net GND: 1425,2995 1530,3075
  rectangle net GND: 3370,3095 3475,3180
  rectangle net GND: 1210,3165 1250,3255
  rectangle net GND: 1125,2740 1225,2790

## Silkscreen, mask and mechanical layers (free items; w line width, h text height)
Board Shape:
  the board outline again, w10
Mechanical 13:
  lines w10: 3500,2600 3500,2615

## Text inside footprints (layer, text, board x,y; h text height)
J1: Mechanical 1 "PCB EDGE" at 1045.83,3283.46 h10 r270